# EAGLE board haptic_glove (EAGLE 9.6.2)
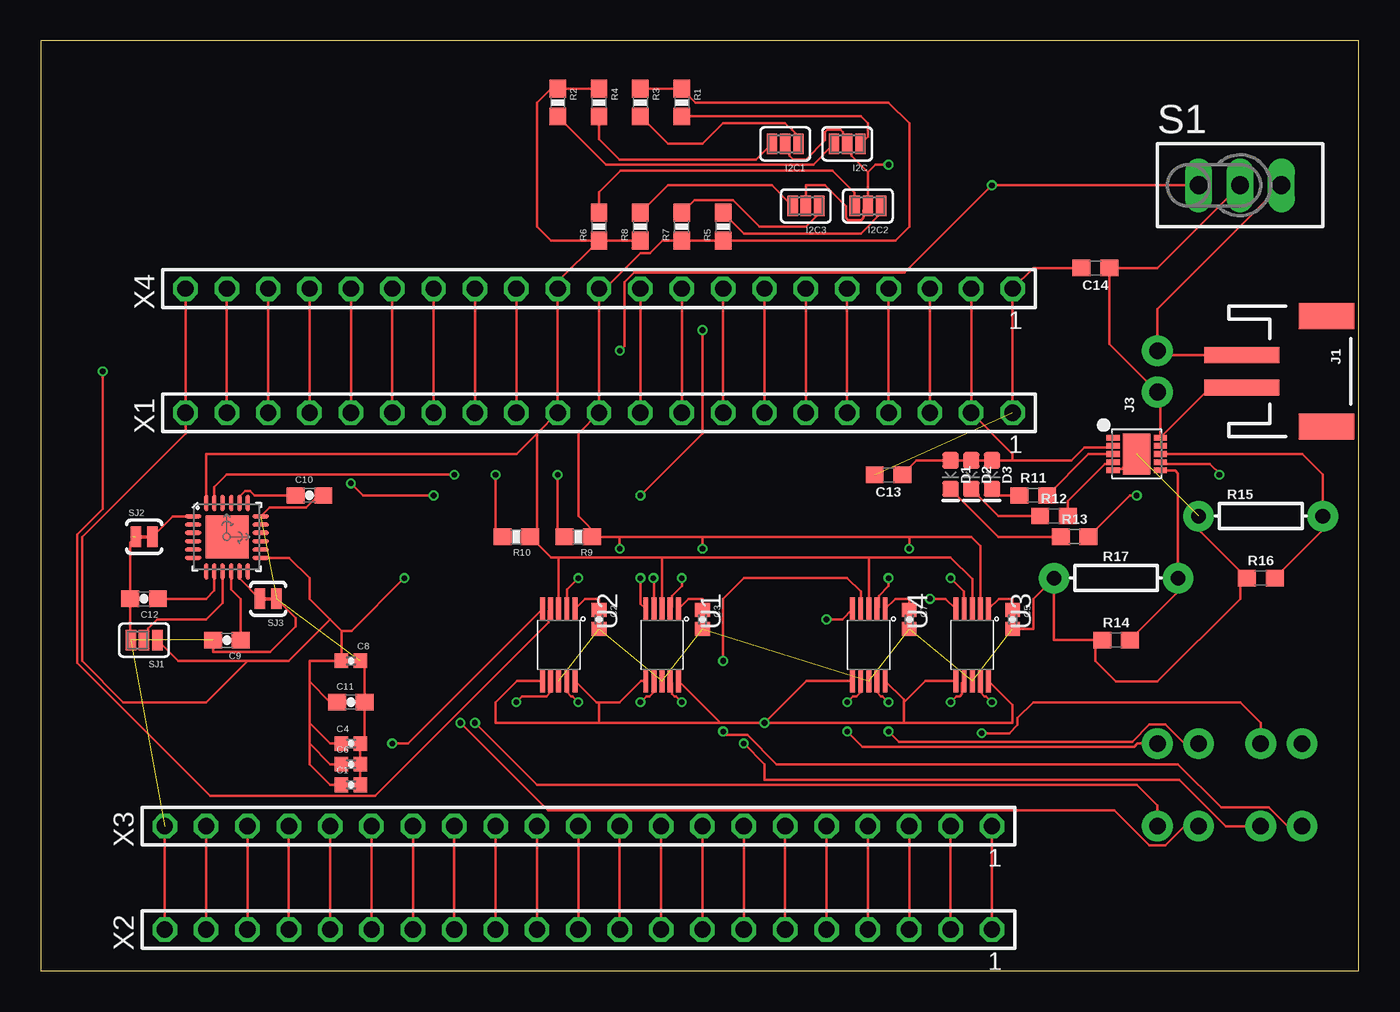
[diagram p0: board, top side]
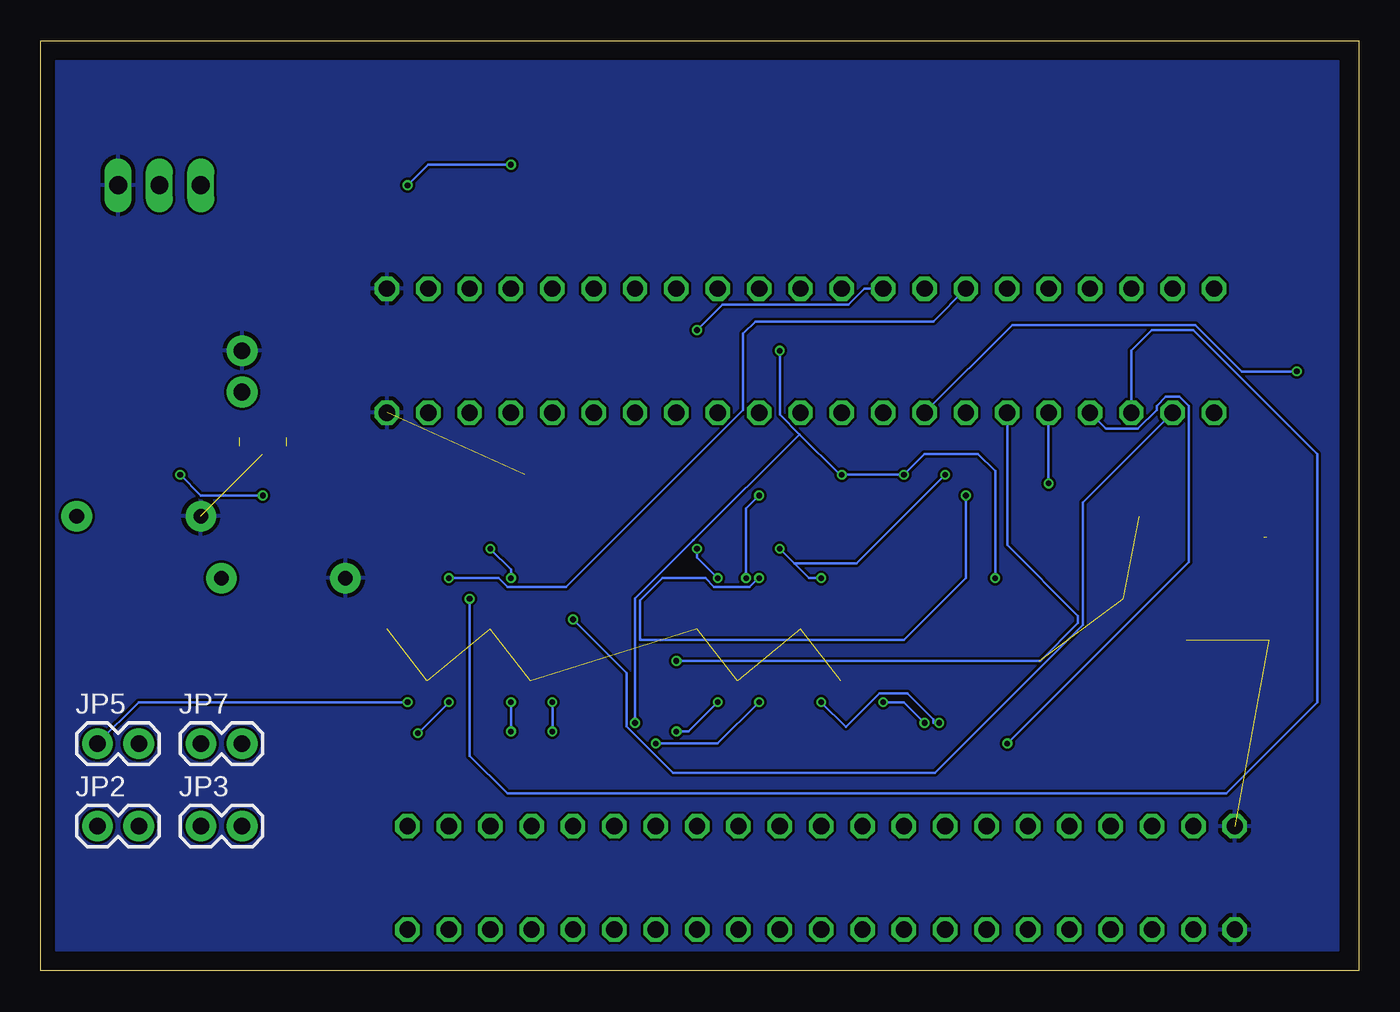
[diagram p1: board, bottom side, seen from below]

Size 80.95 x 57.14 mm. Coordinates in mm from the lower left corner, seen from the top.
Outline: 0,0 80.95,0 80.95,57.14 0,57.14 0,0
Copper layers (1*16): Top 0.035559375mm / dielectric 1.6mm / Bottom 0.035559375mm
Design rules "OSHPark_2_Layer_Rules": minimum track width 6mil, minimum drill 10mil, track to track 6mil, track to pad 6mil, pad to pad 6mil, via to via 6mil, smd to smd 6mil, copper to edge 15mil, drill to drill 6mil, minimum pad ring 5mil, minimum via ring 5mil, stop-mask expansion 2.5mil, vias tented up to drill 0mil, thermal gap 10mil

## Footprints (pad centres in the part's own frame; a part is rotated, then mirrored left to right if it is on the bottom)
0402-CAP = smd 0.85 x 0.9: 1 -0.58,0; 2 0.58,0
0603-CAP = smd 1.1 x 1: 1 -0.85,0; 2 0.85,0
0603 = smd 1.1 x 1: 1 -0.85,0; 2 0.85,0
LED-0603 = smd 1 x 1: A -0.877,0; C 0.877,0
PAD-JUMPER-3-NC_BY_PASTE_YES_SILK_FULL_BOX = smd 0.635 x 1.27: 1 -0.813,0; 2 0,0; 3 0.813,0
JST-2-SMD = smd 1 x 4.6: 1 -1,-3.7; 2 1,-3.7 | smd 1.6 x 3.4: NC1 -3.4,1.5; NC2 3.4,1.5
1X02_NO_SILK = drill 1.016 pad 1.88: 1 0,0; 2 2.54,0
1X02@1 = drill 1.016 pad 1.88: 1 0,0; 2 2.54,0
0603-RES = smd 1.1 x 1: 1 -0.85,0; 2 0.85,0
AXIAL-0.3 = drill 0.9 pad 1.88: P$1 -3.81,0; P$2 3.81,0
TL3XPO = drill 1.1 pad 1.422 long: 1 -2.54,0; 2 0,0; 3 2.54,0
SJ_3_PASTE2&3 = smd 0.635 x 1.27: 1 -0.813,0; 2 0,0; 3 0.813,0
SJ_2S-TRACE = smd 0.635 x 1.27: 1 -0.508,0; 2 0.508,0
VSSOP-10 = smd 1.45 x 0.3: P$1 -1.905,1.06; P$2 -1.905,0.56; P$3 -1.905,0.06; P$4 -1.905,-0.44; P$5 -1.905,-0.94; P$6 2.495,-0.94; P$7 2.495,-0.44; P$8 2.495,0.06; P$9 2.495,0.56; P$10 2.495,1.06
QFN-24-4MM2 = smd 1.016 x 0.254: 1 -2.066,1.257; 2 -2.066,0.75; 3 -2.066,0.247; 4 -2.066,-0.287; 5 -2.066,-0.792; 6 -2.066,-1.297; 13 2.086,-1.297; 14 2.086,-0.792; 15 2.086,-0.287; 16 2.086,0.247; 17 2.086,0.75; 18 2.086,1.257 | smd 0.254 x 1.016: 7 -1.267,-2.122; 8 -0.762,-2.122; 9 -0.258,-2.122; 10 0.278,-2.122; 11 0.78,-2.122; 12 1.287,-2.122; 19 1.287,2.082; 20 0.78,2.082; 21 0.278,2.082; 22 -0.258,2.082; 23 -0.762,2.082; 24 -1.267,2.082 | smd 2.616 x 2.616: P$1 0.02,-0.01
DFN-10 = smd 0.8 x 0.35: P$1 -1.45,1; P$2 -1.45,0.5; P$3 -1.45,0; P$4 -1.45,-0.5; P$5 -1.45,-1; P$6 1.45,-1; P$7 1.45,-0.5; P$8 1.45,0; P$9 1.45,0.5; P$10 1.45,1 | smd 1.7 x 2.5: P$11 0,0
TSW-121-XX-G-S = drill 1 pad 1.5 octagon: 1 25.4,0; 2 22.86,0; 3 20.32,0; 4 17.78,0; 5 15.24,0; 6 12.7,0; 7 10.16,0; 8 7.62,0; 9 5.08,0; 10 2.54,0; 11 0,0; 12 -2.54,0; 13 -5.08,0; 14 -7.62,0; 15 -10.16,0; 16 -12.7,0; 17 -15.24,0; 18 -17.78,0; 19 -20.32,0; 20 -22.86,0; 21 -25.4,0

## Placement (x,y rotation side)
C1  1.0uF  [0402-CAP]  19.05,11.43 0 top
C2  1.0uF  [0402-CAP]  34.29,21.59 270 top
C3  1.0uF  [0402-CAP]  40.64,21.59 270 top
C4  1.0uF  [0402-CAP]  19.05,13.97 0 top
C5  1.0uF  [0402-CAP]  59.69,21.59 270 top
C6  1.0uF  [0402-CAP]  19.05,12.7 0 top
C7  1.0uF  [0402-CAP]  53.34,21.59 270 top
C8  1.0uF  [0402-CAP]  19.05,19.05 0 top
C9  0.1uF  [0603-CAP]  11.43,20.32 180 top
C10  2.2nF  [0603-CAP]  16.51,29.21 0 top
C11  0.1uF  [0603-CAP]  19.05,16.51 0 top
C12  10nF  [0603-CAP]  6.35,22.86 180 top
C13  10uF  [0603]  52.07,30.48 180 top
C14  10uF  [0603]  64.77,43.18 180 top
D1  RED  [LED-0603]  55.88,30.48 270 top
D2  GREEN  [LED-0603]  57.15,30.48 270 top
D3  Yellow  [LED-0603]  58.42,30.48 270 top
I2C  JUMPER-PAD-3-NC_BY_PASTE  [PAD-JUMPER-3-NC_BY_PASTE_YES_SILK_FULL_BOX]  49.53,50.8 180 top
I2C1  JUMPER-PAD-3-NC_BY_PASTE  [PAD-JUMPER-3-NC_BY_PASTE_YES_SILK_FULL_BOX]  45.72,50.8 180 top
I2C2  JUMPER-PAD-3-NC_BY_PASTE  [PAD-JUMPER-3-NC_BY_PASTE_YES_SILK_FULL_BOX]  50.8,46.99 180 top
I2C3  JUMPER-PAD-3-NC_BY_PASTE  [PAD-JUMPER-3-NC_BY_PASTE_YES_SILK_FULL_BOX]  46.99,46.99 180 top
J1  [JST-2-SMD]  77.47,36.83 270 top
J3  [1X02_NO_SILK]  68.58,35.56 90 top
JP2  [1X02@1]  77.47,8.89 0 bottom
JP3  [1X02@1]  71.12,8.89 0 bottom
JP5  [1X02@1]  77.47,13.97 0 bottom
JP7  [1X02@1]  71.12,13.97 0 bottom
R1  2.2k  [0603-RES]  39.37,53.34 270 top
R2  2.2k  [0603-RES]  31.75,53.34 270 top
R3  2.2k  [0603-RES]  36.83,53.34 270 top
R4  2.2k  [0603-RES]  34.29,53.34 270 top
R5  2.2k  [0603-RES]  41.91,45.72 90 top
R6  2.2k  [0603-RES]  34.29,45.72 90 top
R7  2.2k  [0603-RES]  39.37,45.72 90 top
R8  2.2k  [0603-RES]  36.83,45.72 90 top
R9  10k  [0603-RES]  33.02,26.67 180 top
R10  10k  [0603-RES]  29.21,26.67 180 top
R11  1.5k  [0603]  60.96,29.21 0 top
R12  1.5k  [0603]  62.23,27.94 0 top
R13  1.5k  [0603]  63.5,26.67 0 top
R14  1k  [0603]  66.04,20.32 0 top
R15  THERM  [AXIAL-0.3]  74.93,27.94 0 top
R16  10k  [0603]  74.93,24.13 0 top
R17  PROG  [AXIAL-0.3]  66.04,24.13 0 top
S1  TL32PO  [TL3XPO]  73.66,48.26 0 top
SJ1  [SJ_3_PASTE2&3]  6.35,20.32 180 top
SJ2  [SJ_2S-TRACE]  6.35,26.67 0 top
SJ3  [SJ_2S-TRACE]  13.97,22.86 180 top
U1  DRV2605L  [VSSOP-10]  38.1,20.32 270 top
U2  DRV2605L  [VSSOP-10]  31.75,20.32 270 top
U3  DRV2605L  [VSSOP-10]  57.15,20.32 270 top
U4  DRV2605L  [VSSOP-10]  50.8,20.32 270 top
U5  MPU-6050-1  [QFN-24-4MM2]  11.43,26.67 0 top
U6  MCP73833  [DFN-10]  67.31,31.75 0 top
X1  TSW-121-07-G-S  [TSW-121-XX-G-S]  34.29,34.29 0 top
X2  TSW-121-07-G-S  [TSW-121-XX-G-S]  33.02,2.54 0 top
X3  TSW-121-07-G-S  [TSW-121-XX-G-S]  33.02,8.89 0 top
X4  TSW-121-07-G-S  [TSW-121-XX-G-S]  34.29,41.91 0 top

## Library data of the parts
C1-C8 = SparkFun-Capacitors; PROD_ID: CAP-12417
C9-C12 R9 R10 SJ1-SJ3 = SparkFun
C13 C14 = SparkFun-Capacitors; PROD_ID: CAP-11015
D1 = SparkFun-LED; PROD_ID: DIO-00819
D2 = SparkFun-LED; PROD_ID: DIO-00821
D3 = SparkFun-LED; PROD_ID: DIO-09003
I2C I2C1-I2C3 = SparkFun-Passives
J1 = SparkFun-Connectors; PROD_ID: CONN-11443; SF_ID: PRT-08612
J3 JP2 JP3 JP5 JP7 = SparkFun-Connectors
R1-R8 = SparkFun-Resistors; PROD_ID: RES-08272
R11-R13 = SparkFun-Resistors; PROD_ID: RES-08306
R14 = SparkFun-Resistors; PROD_ID: RES-07856
R15 R17 = SparkFun-Resistors
R16 = SparkFun-Resistors; PROD_ID: RES-00824
S1 = switch
U1-U4 = SparkFun-PowerIC; PROD_ID: IC-13504
U5 = Testing
U6 = SparkFun-IC-Power; PROD_ID: IC-14369
X1-X4 = con-samtec; MF: Samtec Inc.; MPN: TSW-121-07-G-S

## Nets
ADO: SJ1.2 U5.9
CLKIN: SJ2.2 U5.1
FSYNC: SJ3.2 U5.11
GND: C1.2 C2.2 C3.2 C4.2 C5.2 C6.2 C7.2 C8.2 C9.2 C10.2 C11.2 C12.2 C13.2 C14.2 J1.1 J3.2 R14.1 R15.P$1 R16.1 R17.P$1 S1.3 SJ1.3 SJ2.1 SJ3.1 U1.P$8 U2.P$8 U3.P$8 U4.P$8 U5.18 U6.P$5 U6.P$11 X1.1 X2.21 X3.21 X4.1
INT: U5.12
N$1: X2.1 X3.1
N$2: X2.2 X3.2
N$3: C3.1 U1.P$1
N$4: U1.P$4 X1.13 X4.13
N$5: U1.P$5 X1.17 X4.17
N$6: JP2.1 U1.P$9
N$7: JP2.2 U1.P$7
N$8: I2C.3 R2.2
N$9: I2C.1 R1.2
N$10: C2.1 U2.P$1
N$11: U2.P$4 X1.14 X4.14
N$12: U2.P$5 X1.18 X4.18
N$13: JP3.1 U2.P$9
N$14: JP3.2 U2.P$7
N$15: I2C1.3 R4.2
N$16: I2C1.1 R3.2
N$17: X2.3 X3.3
N$18: X2.4 X3.4
N$19: C5.1 U3.P$1
N$20: U3.P$4 X1.15 X4.15
N$21: U3.P$5 X1.19 X4.19
N$22: JP5.1 U3.P$9
N$23: JP5.2 U3.P$7
N$24: I2C2.3 R6.2
N$25: I2C2.1 R5.2
N$26: X2.5 X3.5
N$27: X2.6 X3.6
N$28: C7.1 U4.P$1
N$29: U4.P$4 X1.16 X4.16
N$30: U4.P$5 X1.20 X4.20
N$31: JP7.1 U4.P$9
N$32: JP7.2 U4.P$7
N$33: I2C3.3 R8.2
N$34: I2C3.1 R7.2
N$35: X2.7 X3.7
N$36: X2.8 X3.8
N$37: C10.1 U5.20
N$38: C9.1 U5.10
N$39: X2.9 X3.9
N$40: X2.10 X3.10
N$41: X2.11 X3.11
N$42: X2.12 X3.12
N$43: X2.13 X3.13
N$44: X2.14 X3.14
N$45: X2.15 X3.15
N$46: X2.16 X3.16
N$47: X2.17 X3.17
N$48: X2.18 X3.18
N$49: X2.19 X3.19
N$50: X2.20 X3.20
N$51: C14.1 J1.2 J3.1 S1.2 U6.P$9 U6.P$10
N$52: X1.10 X4.10
N$53: X1.9 X4.9
N$54: X1.8 X4.8
N$55: X1.7 X4.7
N$56: X1.6 X4.6
N$57: X1.5 X4.5
N$58: X1.4 X4.4
N$59: X1.3 X4.3
N$60: C13.1 D1.A D2.A D3.A U6.P$1 U6.P$2 X1.2 X4.2
N$61: D1.C R13.1
N$62: D2.C R12.1
N$63: D3.C R11.1
PG: R13.2 U6.P$7
PROG: R14.2 R17.P$2 U6.P$6
SCL: R1.1 R3.1 R5.1 R7.1 R9.1 U1.P$2 U2.P$2 U3.P$2 U4.P$2 U5.23 X1.11 X4.11
SDA: R2.1 R4.1 R6.1 R8.1 R10.1 U1.P$3 U2.P$3 U3.P$3 U4.P$3 U5.24 X1.12 X4.12
STAT1: R11.2 U6.P$3
STAT2: R12.2 U6.P$4
THERM: R15.P$2 R16.2 U6.P$8
VCC: C1.1 C4.1 C6.1 C8.1 C11.1 I2C1.2 I2C2.2 I2C3.2 I2C.2 R9.2 R10.2 S1.1 SJ1.1 U1.P$6 U1.P$10 U2.P$6 U2.P$10 U3.P$6 U3.P$10 U4.P$6 U4.P$10 U5.13 X1.21 X4.21
VIO: C12.1 U5.8

## Tracks (layer width: path | path; a pad name or v marks a point on that pad's centre or on a via)
ADO
  Top 0.152: SJ1.2 6.62,20.59 6.62,21.05 7.16,21.59 10.16,21.59 11.17,22.6 U5.9
CLKIN
  Top 0.152: SJ2.2 8.11,27.93 U5.1
FSYNC
  Top 0.152: SJ3.2 12.21,24.11 U5.11
GND  (14 unrouted)
  Top 0.152: J1.1 68.85,37.83 J3.2 68.58,40.64 S1.3 | R15.P$1 71.12,27.09 R16.1 73.66,24.13 73.66,22.86 68.58,17.78 66.04,17.78 64.77,19.05 64.77,19.9 R14.1 62.23,20.32 R17.P$1 60.96,22.86 60.96,21.01 C5.2 | X3.21 X2.21 | SJ1.3 5.5,20.36 C12.2 5.5,26.33 5.64,26.47 5.64,26.67 | C9.2 10.58,19.59 14.09,19.59 15.66,21.17 15.66,21.67 SJ3.1 | C8.2 19.9,18.78 C11.2 19.9,14.24 C4.2 C6.2 C1.2 | C10.2 17.03,29.21 16.3,28.48 14.07,28.48 U5.18 | U6.P$5 65.96,30.85 66.36,30.85 67.26,31.75 U6.P$11 | C14.2 60.96,43.18 X4.1 X1.1
  pour Bottom: 1.27,55.88 80.01,55.88 80.01,1.27 1.27,1.27
N$1
  Top 0.152: X3.1 X2.1
N$2
  Top 0.152: X3.2 X2.2
N$3
  Top 0.152: C3.1 40.64,22.86 39.8,22.86 U1.P$1
N$4  (via drill 0.35)
  Top 0.152: X4.13 X1.13 | U1.P$4 37.66,24.1 v37.63,24.13 | v36.83,29.21 40.64,33.02 v40.64,39.37
  Bottom 0.152: v37.63,24.13 37.63,28.41 v36.83,29.21 | v40.64,39.37 39.08,40.93 31.35,40.93 30.37,41.91 X4.13
N$5  (via drill 0.35)
  Top 0.152: U1.P$5 36.83,22.55 v36.83,24.13 | v24.13,29.21 19.79,29.21 v19.05,29.95 | X4.17 X1.17
  Bottom 0.152: v36.83,24.13 36.88,24.13 37.41,23.6 39.59,23.6 40.12,24.13 42.76,24.13 44.14,22.74 44.14,20.32 27.94,20.32 24.13,24.13 v24.13,29.21 | v19.05,29.95 X1.17
N$6  (via drill 0.35)
  Top 0.152: U1.P$9 38.78,17.7 38.78,17 38.92,16.87 39.01,16.87 v39.37,16.51 | v41.91,14.71 42.12,14.5 43.4,14.5 45.2,12.7 69.85,12.7 72.49,10.06 75.41,10.06 76.58,8.89 JP2.1
  Bottom 0.152: v39.37,16.51 41.17,14.71 v41.91,14.71
N$7  (via drill 0.35)
  Top 0.152: v36.83,16.51 37.19,16.87 37.41,16.87 37.66,17.13 U1.P$7 | v43.18,13.97 44.45,12.7 44.45,11.74 69.93,11.74 72.77,8.89 JP2.2
  Bottom 0.152: v36.83,16.51 39.37,13.97 v43.18,13.97
N$8
  Top 0.152: I2C.3 47.45,49.53 34.71,49.53 R2.2
N$9
  Top 0.152: R1.2 50.38,52.49 50.8,52.07 50.8,51.26 I2C.1
N$10
  Top 0.152: C2.1 34.29,22.86 33.44,22.86 U2.P$1
N$11  (via drill 0.35)
  Top 0.152: X4.14 X1.14 | U2.P$4 31.19,22.1 31.19,21.41 20.54,10.75 10.41,10.75 2.23,18.92 2.23,26.8 3.81,28.37 v3.81,36.83
  Bottom 0.152: v3.81,36.83 7.19,36.83 10.03,39.67 21.29,39.67 X1.14
N$12  (via drill 0.35)
  Top 0.152: X4.18 X1.18 | U2.P$5 22.55,13.97 v21.59,13.97
  Bottom 0.152: X1.18 15.53,33.31 13.57,33.31 12.41,34.47 12.41,34.7 11.84,35.27 11.02,35.27 10.45,34.7 10.45,25.11 v21.59,13.97
N$13  (via drill 0.35)
  Top 0.152: v33.02,16.51 32.66,16.87 32.56,16.87 32.31,17.13 U2.P$9 | v25.77,15.24 31.14,9.87 65.95,9.87 68.1,7.72 69.06,7.72 70.23,8.89 JP3.1
  Bottom 0.152: v33.02,16.51 31.49,14.98 29.43,17.04 27.72,17.04 26.14,15.46 26.14,15.24 v25.77,15.24
N$14  (via drill 0.35)
  Top 0.152: v29.21,16.51 29.57,16.87 31.05,16.87 31.31,17.13 U2.P$7 | v26.67,15.24 30.48,11.43 67.31,11.43 68.58,10.16 JP3.2
  Bottom 0.152: v29.21,16.51 27.94,16.51 v26.67,15.24
N$15
  Top 0.152: I2C1.3 43.94,49.84 35.56,49.84 34.29,51.1 R4.2
N$16
  Top 0.152: I2C1.1 46.53,51.26 46.13,51.66 45.72,52.07 41.91,52.07 40.64,50.8 38.52,50.8 R3.2
N$17
  Top 0.152: X3.3 X2.3
N$18
  Top 0.152: X3.4 X2.4
N$19
  Top 0.152: C5.1 59.69,22.86 58.84,22.86 U3.P$1
N$20  (via drill 0.35)
  Top 0.152: U3.P$4 56.71,23.3 v55.88,24.13 | X4.15 X1.15
  Bottom 0.152: v55.88,24.13 52.82,24.13 52.29,23.6 48.68,23.6 37.81,34.47 37.81,39.14 37.05,39.9 26.14,39.9 X4.15
N$21  (via drill 0.35)
  Top 0.152: U3.P$5 55.58,22.86 v54.61,22.86 | X1.19 X4.19
  Bottom 0.152: v54.61,22.86 54.61,13.22 52.29,10.9 8.15,10.9 2.54,16.51 2.54,31.75 10.16,39.37 12.7,39.37 13.97,38.1 X1.19
N$22  (via drill 0.35)
  Top 0.152: v58.42,16.51 58.06,16.87 57.97,16.87 57.71,17.13 U3.P$9
  Bottom 0.152: v58.42,16.51 74.93,16.51 JP5.1
N$23  (via drill 0.35)
  Top 0.152: U3.P$7 56.59,17.7 56.59,17 56.45,16.87 56.24,16.87 v55.88,16.51 | v57.78,14.6 59.49,14.6 60,15.11 60,15.54 60.96,16.51 73.66,16.51 74.93,15.24 JP5.2
  Bottom 0.152: v55.88,16.51 v57.78,14.6
N$24
  Top 0.152: I2C2.3 49.99,47.8 48.62,49.17 35.62,49.17 34.29,47.84 R6.2
N$25
  Top 0.152: R5.2 43.18,45.3 50.38,45.3 51.61,46.53 I2C2.1
N$26
  Top 0.152: X3.5 X2.5
N$27
  Top 0.152: X3.6 X2.6
N$28
  Top 0.152: C7.1 53.34,22.86 52.5,22.86 U4.P$1
N$29  (via drill 0.35)
  Top 0.152: U4.P$4 50.36,23.3 49.53,24.13 43.18,24.13 41.91,22.86 v41.91,19.05 | X4.16 X1.16
  Bottom 0.152: X1.16 21.59,26.15 17.25,21.81 17.25,21.37 19.57,19.05 v41.91,19.05
N$30  (via drill 0.35)
  Top 0.152: U4.P$5 49.23,21.59 v48.26,21.59 | X4.20 X1.20
  Bottom 0.152: X1.20 16.94,28.77 16.94,21.24 26.02,12.17 42.13,12.17 44.98,15.02 44.98,18.31 v48.26,21.59
N$31  (via drill 0.35)
  Top 0.152: JP7.1 70.23,13.97 69.06,15.14 68.1,15.14 67.03,14.07 52.7,14.07 v52.07,14.71 | v52.07,16.51 51.71,16.87 51.62,16.87 51.36,17.13 U4.P$9
  Bottom 0.152: v52.07,14.71 v52.07,16.51
N$32  (via drill 0.35)
  Top 0.152: JP7.2 67.36,13.97 67.16,13.77 50.47,13.77 v49.53,14.71 | v49.53,16.51 49.89,16.87 50.11,16.87 50.36,17.13 U4.P$7
  Bottom 0.152: v49.53,14.71 v49.53,16.51
N$33
  Top 0.152: I2C3.3 44.91,48.26 38.52,48.26 R8.2
N$34
  Top 0.152: I2C3.1 47.8,46.53 47,45.72 44.13,45.72 42.5,47.35 40.15,47.35 R7.2
N$35
  Top 0.152: X3.7 X2.7
N$36
  Top 0.152: X3.8 X2.8
N$37
  Top 0.152: C10.1 13.14,29.21 12.86,29.49 12.57,29.49 12.21,29.13 U5.20
N$38
  Top 0.152: U5.10 11.71,23.43 12.28,22.86 C9.1
N$39
  Top 0.152: X3.9 X2.9
N$40
  Top 0.152: X3.10 X2.10
N$41
  Top 0.152: X3.11 X2.11
N$42
  Top 0.152: X3.12 X2.12
N$43
  Top 0.152: X3.13 X2.13
N$44
  Top 0.152: X3.14 X2.14
N$45
  Top 0.152: X3.15 X2.15
N$46
  Top 0.152: X3.16 X2.16
N$47
  Top 0.152: X3.17 X2.17
N$48
  Top 0.152: X3.18 X2.18
N$49
  Top 0.152: X3.19 X2.19
N$50
  Top 0.152: X3.20 X2.20
N$51  (1 unrouted)
  Top 0.152: J1.2 71.84,35.83 U6.P$10 68.76,35.38 J3.1 65.62,38.52 C14.1 68.58,43.18 S1.2
N$52
  Top 0.152: X4.10 X1.10
N$53
  Top 0.152: X4.9 X1.9
N$54
  Top 0.152: X4.8 X1.8
N$55
  Top 0.152: X4.7 X1.7
N$56
  Top 0.152: X4.6 X1.6
N$57
  Top 0.152: X4.5 X1.5
N$58
  Top 0.152: X4.4 X1.4
N$59
  Top 0.152: X4.3 X1.3
N$60  (1 unrouted)
  Top 0.152: C13.1 53.8,31.36 D1.A D2.A D3.A 59.69,31.36 | U6.P$2 65.76,32.15 64.09,32.15 63.3,31.36 59.69,31.36 | 59.69,31.36 59.69,31.75 X1.2 X4.2
N$61
  Top 0.152: D1.C 58.81,26.67 R13.1
N$62
  Top 0.152: D2.C 58.81,27.94 R12.1
N$63
  Top 0.152: D3.C 58.81,29.21 R11.1
PG  (via drill 0.35)
  Top 0.152: R13.2 66.89,29.21 v67.31,29.21 | U6.P$7 68.86,31.15 71.8,31.15 72.47,30.48 v72.39,30.48
  Bottom 0.152: v67.31,29.21 71.12,29.21 v72.39,30.48
PROG
  Top 0.152: U6.P$6 69.67,30.75 69.85,30.57 R17.P$2 69.85,23.28 R14.2
SCL  (via drill 0.35)
  Top 0.152: R9.1 34.29,26.67 | 34.29,26.67 35.56,26.67 | 40.64,26.67 53.34,26.67 | 53.34,26.67 57.15,26.67 57.71,26.11 U3.P$2 | v33.02,24.13 32.31,23.42 U2.P$2 | 40.64,26.67 v40.64,25.93 | U1.P$2 38.78,22.35 38.78,23.04 39.37,23.63 v39.37,24.13 | U4.P$2 51.48,22.35 51.48,23.04 52.07,23.63 v52.07,24.13 | v53.34,25.93 53.34,26.67 | R3.1 R1.1 40.22,53.34 52.07,53.34 53.34,52.07 53.34,45.72 52.49,44.87 R5.1 R7.1 38.2,44.87 37.42,44.09 36.83,44.09 34.65,41.91 X4.11 X1.11 33.02,33.02 33.02,27.94 34.29,26.67 | v35.56,25.93 35.56,26.67 | 35.56,26.67 40.64,26.67 | v25.4,30.48 11.43,30.48 10.67,29.72 U5.23
  Bottom 0.152: v35.56,25.93 34.66,25.03 | 34.66,25.03 33.76,24.13 v33.02,24.13 | v40.64,25.93 40.64,25.4 v39.37,24.13 | v52.07,24.13 52.07,24.66 v53.34,25.93 | 34.66,25.03 30.85,25.03 v25.4,30.48
SDA
  Top 0.152: 30.48,27.09 R10.1 30.48,26.25 | 30.48,26.25 31.33,25.4 31.75,25.4 | 31.75,25.4 38.1,25.4 | 38.1,25.4 43.18,25.4 | 43.18,25.4 50.8,25.4 | 50.8,25.4 55.88,25.4 57.21,24.07 U3.P$3 | 31.75,25.4 31.81,25.34 U2.P$3 | 38.1,25.4 38.16,25.34 U1.P$3 | 43.18,25.4 | 50.8,25.4 50.86,25.34 U4.P$3 | R4.1 R2.1 31.33,54.19 30.48,53.34 30.48,45.72 31.33,44.87 R6.1 | R6.1 R8.1 36.36,44.4 | R6.1 31.75,42.33 X4.12 X1.12 30.48,33.02 | 30.48,33.02 30.48,26.25 | U5.24 10.16,30.48 10.16,31.75 29.21,31.75 30.48,33.02
STAT1
  Top 0.152: R11.2 64.35,31.75 U6.P$3
STAT2
  Top 0.152: U6.P$4 65.76,31.15 65.37,31.15 63.08,28.87 R12.2
THERM
  Top 0.152: R16.2 78.74,27.09 R15.P$2 78.74,30.48 77.47,31.75 U6.P$8
VCC  (via drill 0.35)
  Top 0.152: 50.8,49.07 I2C2.2 50.53,46.72 50.53,46.26 50.4,46.13 49.58,46.13 49.44,46.26 49.44,46.99 48.17,48.26 46.99,48.26 I2C3.2 47.26,47.26 | 50.8,49.07 49.8,50.07 49.8,50.53 I2C.2 49.26,51.07 49.26,51.53 49.13,51.66 48.31,51.66 48.17,51.53 48.17,51.02 46.99,49.84 46.22,49.84 45.99,50.07 45.99,50.53 I2C1.2 | 50.8,49.07 51.26,49.53 v52.07,49.53 | S1.1 v58.42,48.26 53.05,42.89 36.42,42.89 35.85,42.31 35.85,38.39 v35.56,38.1 | R9.2 31.75,27.09 v31.75,30.48 | v27.94,30.48 27.94,26.67 R10.2 | 18.47,20.9 C8.1 16.51,19.05 16.51,17.78 | 16.51,13.97 17.78,12.7 C6.1 | 16.51,13.97 16.51,12.7 17.78,11.43 C1.1 | 16.51,17.78 16.51,15.24 | 16.51,15.24 16.51,13.97 | 16.51,15.24 17.78,13.97 C4.1 | C11.1 17.78,16.51 16.51,17.78 | U5.13 15.27,25.37 16.51,24.13 16.51,22.86 17.78,21.59 | SJ1.1 8.43,19.05 12.7,19.05 | 12.7,19.05 15.24,19.05 17.78,21.59 | 12.7,19.05 10.16,16.51 5.08,16.51 2.54,19.05 2.54,26.67 8.89,33.02 X1.21 X4.21 | v44.45,15.24 41.75,15.24 | 41.75,15.24 U1.P$10 | v44.45,15.24 47.03,17.82 U4.P$6 | U4.P$10 53.01,16.68 53.01,16.51 | 53.01,16.51 53.01,15.24 | v44.45,15.24 53.01,15.24 | 53.01,15.24 59.69,15.24 59.69,16.34 U3.P$10 | 53.01,16.51 54.32,17.82 U3.P$6 | 41.75,15.24 34.29,15.24 | 34.29,15.24 27.94,15.24 27.94,16.51 29.25,17.82 U2.P$6 | U1.P$6 36.88,17.82 35.56,16.51 34.29,16.51 | 34.29,16.51 34.12,16.51 U2.P$10 | 34.29,16.51 34.29,15.24 | v22.33,24.13 19.1,20.9 18.47,20.9 | 17.78,21.59 18.47,20.9
  Bottom 0.152: v52.07,49.53 57.15,49.53 v58.42,48.26 | 34.35,32.96 35.56,34.18 v35.56,38.1 | 34.35,32.96 31.86,30.48 v31.75,30.48 v27.94,30.48 26.67,31.75 23.38,31.75 22.33,30.7 v22.33,24.13 | 34.35,32.96 40.85,26.46 40.86,26.46 44.45,22.87 v44.45,15.24
VIO
  Top 0.152: C12.1 10.16,22.86 10.67,23.37 U5.8